# Altium PCB Transceiver.PcbDoc (part 2 of 2)
Units mm, origin at the board's own origin, x right, y up, seen from the top; angles counter-clockwise.
Board outline 140 x 70 mm, 2 copper layers (Top Layer, Bottom Layer); 90 components, 122 nets, 482 pads, 145 vias.
Unrouted connection lines stored in the file: 2.
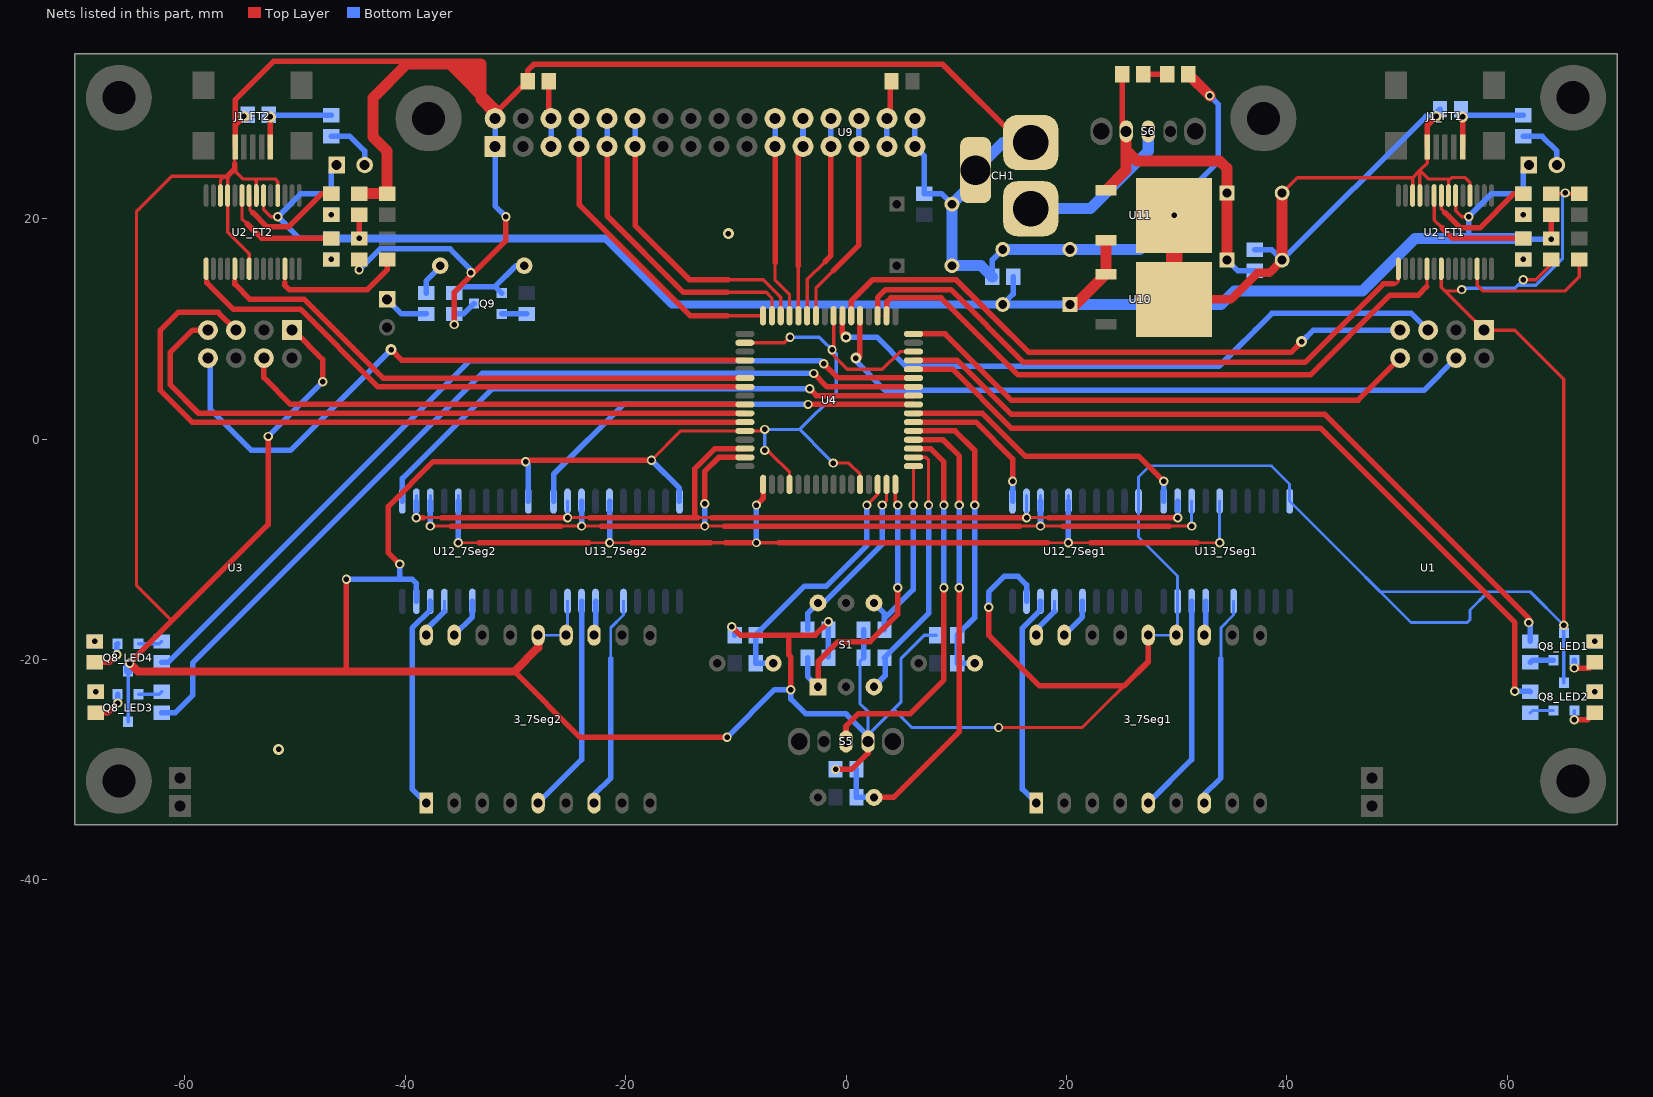
[diagram p2: the nets of this part, all layers, seen from the top]

## Via types
v1: diameter 0.85, hole 0.5, Top Layer to Bottom Layer, 111 vias
v2: diameter 1, hole 0.5, Top Layer to Bottom Layer, 24 vias
v3: diameter 0.8, hole 0.5, Top Layer to Bottom Layer, 10 vias

## Nets (pads, with @x,y where several pads share a name; then routed paths per layer and width w, separated by ;. In a path a pad name is that pad's centre, name@x,y a point inside that pad or via, vN(x,y) a via of type N, cw(c..) or ccw(c..) an arc to the next point about the centre after c; other vN are vias at no path point) (continued)
E: U4.46 U12_7Seg1.2 U12_7Seg2.2 U13_7Seg1.2 U13_7Seg2.2 | length 111.4
  Top Layer w0.254: -38.354,-7.112 -36.703,-7.112 ; v1(-25.273,-7.112) -23.241,-7.112 ; v1(16.383,-7.112) 18.415,-7.112
  Top Layer w0.3: -13.462,-7.112 -13.449,-7.099 -12.205,-7.099 -12.192,-7.112
  Top Layer w0.5: v1(-38.989,-7.112) -38.354,-7.112 ; -36.703,-7.112 v1(-25.273,-7.112) ; -23.241,-7.112 -13.716,-7.112 ; -13.462,-7.112 -13.716,-7.112 ; -12.192,-7.112 13.462,-7.112 ; -10.401,-7.112 -7.747,-7.112 13.462,-7.112 ; U4.46@-9.174,-0.844 -11.893,-0.844 -13.716,-2.667 -13.716,-7.112 ; v1@16.27,-6.999 v1(16.383,-7.112) 13.462,-7.112 ; 18.415,-7.112 v1(30.099,-7.112)
  Bottom Layer w0.254: U12_7Seg2.2@-38.989,-5.61 U12_7Seg2.2@-38.989,-5.102 ; v1(-25.273,-7.112) U13_7Seg2.2@-25.273,-5.61 ; v1(16.383,-7.112) U12_7Seg1.2@16.383,-5.61 U12_7Seg1.2@16.383,-5.102 ; v1(30.099,-7.112) U13_7Seg1.2@30.099,-5.61
  Bottom Layer w0.5: v1(-38.989,-7.112) U12_7Seg2.2@-38.989,-5.61 ; v1(30.099,-7.112) U13_7Seg1.2@30.099,-5.61
E1_7Seg1: 3_7Seg1.1 U12_7Seg1.18 | length 19.5
  Bottom Layer w0.5: 3_7Seg1.1@17.272,-33.02 16.002,-31.75 16.002,-17.145 17.653,-15.494 U12_7Seg1.18@17.653,-14.71
E1_7Seg2: 3_7Seg2.1 U12_7Seg2.18 | length 19.5
  Bottom Layer w0.5: 3_7Seg2.1@-38.1,-33.02 -39.37,-31.75 -39.37,-17.145 -37.719,-15.494 U12_7Seg2.18@-37.719,-14.71
E2_7Seg1: 3_7Seg1.5 U13_7Seg1.18 | length 19.9
  Bottom Layer w0.5: 3_7Seg1.5@27.432,-33.02 31.369,-29.083 U13_7Seg1.18@31.369,-14.71
E2_7Seg2: 3_7Seg2.5 U13_7Seg2.18 | length 19.9
  Bottom Layer w0.5: 3_7Seg2.5@-27.94,-33.02 -24.003,-29.083 U13_7Seg2.18@-24.003,-14.71
EN1_7Seg1: U4.6 U12_7Seg1.1 | length 14.2
  Top Layer w0.5: U4.6@6.126,1.556 11.779,1.556 15.113,-1.778 v1(15.113,-3.81)
  Bottom Layer w0.5: U12_7Seg1.1@15.113,-5.61 v1(15.113,-3.81)
EN1_7Seg2: U4.9 U12_7Seg2.1 | length 52.1
  Top Layer w0.5: v1(-3.302,4.572) -2.686,3.956 U4.9@6.126,3.956
  Bottom Layer w0.5: U12_7Seg2.1@-40.259,-5.61 -40.259,-3.556 -32.131,4.572 v1(-3.302,4.572)
EN2_7Seg1: U4.7 U13_7Seg1.1 | length 27.1
  Top Layer w0.5: U4.7@6.126,2.356 12.376,2.356 16.256,-1.524 26.543,-1.524 v1(28.829,-3.81)
  Bottom Layer w0.5: U13_7Seg1.1@28.829,-5.61 v1(28.829,-3.81)
EN2_7Seg2: U4.8 U13_7Seg2.1 | length 37.7
  Top Layer w0.5: v1(-3.448,3.156) U4.8@6.126,3.156
  Bottom Layer w0.5: U13_7Seg2.1@-26.543,-5.61 -26.543,-3.175 -20.212,3.156 v1(-3.448,3.156)
F: U4.47 U12_7Seg1.3 U12_7Seg2.3 U13_7Seg1.3 U13_7Seg2.3 | length 92.4
  Top Layer w0.254: v1(-37.719,-7.874) -35.814,-7.874 ; -25.908,-7.874 v1(-24.003,-7.874) -22.225,-7.874 ; 15.748,-7.874 v1(17.653,-7.874) 19.685,-7.874 ; 29.337,-7.874 v1(31.369,-7.874)
  Top Layer w0.3: v3(-12.827,-7.874) -11.049,-7.874
  Top Layer w0.5: -35.814,-7.874 -25.908,-7.874 ; -22.225,-7.874 -13.716,-7.874 v3@-13.208,-7.874 ; v1(-12.827,-5.842) -12.827,-2.921 -11.55,-1.644 U4.47@-9.174,-1.644 ; -11.049,-7.874 15.748,-7.874 ; 19.685,-7.874 29.337,-7.874
  Bottom Layer w0.254: U12_7Seg2.3@-37.719,-5.61 U12_7Seg2.3@-37.719,-5.102 ; v1(-24.003,-7.874) U13_7Seg2.3@-24.003,-5.61 ; v1(17.653,-7.874) U12_7Seg1.3@17.653,-5.61 U12_7Seg1.3@17.653,-5.102 ; v1(31.369,-7.874) U13_7Seg1.3@31.369,-5.61
  Bottom Layer w0.5: v1(-37.719,-7.874) U12_7Seg2.3@-37.719,-5.61 ; v1(-24.003,-7.874) U13_7Seg2.3@-24.003,-5.61 ; v3(-12.827,-7.874) v1(-12.827,-5.842) ; v1(17.653,-7.874) U12_7Seg1.3@17.653,-5.61
F1_7Seg1: 3_7Seg1.18 U12_7Seg1.17 | length 11.3
  Bottom Layer w0.254: 3_7Seg1.18@17.272,-17.78 3_7Seg1.18@17.272,-17.272 ; U12_7Seg1.17@18.923,-14.71 U12_7Seg1.17@18.923,-15.621 ; 3_7Seg1.18@17.272,-17.272 U12_7Seg1.17@18.923,-15.621 ; 3_7Seg1.18@17.272,-17.272 U12_7Seg1.17@18.923,-15.621
  Bottom Layer w0.5: 3_7Seg1.18@17.272,-17.78 17.462,-17.59 17.462,-17.081 18.923,-15.621 3_7Seg1.18@17.272,-17.272
F1_7Seg2: 3_7Seg2.18 U12_7Seg2.17 | length 11.3
  Bottom Layer w0.254: 3_7Seg2.18@-38.1,-17.78 3_7Seg2.18@-38.1,-17.272 ; U12_7Seg2.17@-36.449,-14.71 U12_7Seg2.17@-36.449,-15.621 ; 3_7Seg2.18@-38.1,-17.272 U12_7Seg2.17@-36.449,-15.621 ; 3_7Seg2.18@-38.1,-17.272 U12_7Seg2.17@-36.449,-15.621
  Bottom Layer w0.5: 3_7Seg2.18@-38.1,-17.78 -37.91,-17.59 -37.91,-17.081 -36.449,-15.621 3_7Seg2.18@-38.1,-17.272
F2_7Seg1: 3_7Seg1.12 U13_7Seg1.17 | length 3.3
  Bottom Layer w0.254: U13_7Seg1.17@32.512,-14.837 U13_7Seg1.17@32.639,-14.71
  Bottom Layer w0.5: 3_7Seg1.12@32.512,-17.78 32.639,-17.653 U13_7Seg1.17@32.639,-14.71
F2_7Seg2: 3_7Seg2.12 U13_7Seg2.17 | length 3.3
  Bottom Layer w0.254: U13_7Seg2.17@-22.86,-14.837 U13_7Seg2.17@-22.733,-14.71
  Bottom Layer w0.5: 3_7Seg2.12@-22.86,-17.78 -22.733,-17.653 U13_7Seg2.17@-22.733,-14.71
G: U4.49 U12_7Seg1.5 U12_7Seg2.5 U13_7Seg1.5 U13_7Seg2.5 | length 135.2
  Top Layer w0.2: -6.096,-9.398 -5.461,-9.398
  Top Layer w0.254: v1(-35.179,-9.398) v1(-21.463,-9.398) -19.431,-9.398 ; 2.921,-9.398 v1(20.193,-9.398) v1(33.909,-9.398)
  Top Layer w0.3: -12.319,-9.398 -10.922,-9.398 ; v3(-8.128,-9.398) -6.096,-9.398
  Top Layer w0.5: -33.274,-9.398 -23.368,-9.398 ; -19.431,-9.398 -13.589,-9.398 ; -13.208,-9.398 -13.589,-9.398 ; -12.319,-9.398 -13.589,-9.398 ; -10.922,-9.398 v3(-8.128,-9.398) ; v1(-8.128,-5.969) -7.524,-5.365 U4.49@-7.524,-4.094 ; -6.096,-9.398 -4.064,-9.398 ; -4.953,-9.398 -4.064,-9.398 ; 18.288,-9.398 2.921,-9.398 -4.064,-9.398 ; 22.225,-9.398 31.877,-9.398
  Bottom Layer w0.254: U12_7Seg2.5@-35.179,-5.61 U12_7Seg2.5@-35.179,-5.102 ; v1(-21.463,-9.398) U13_7Seg2.5@-21.463,-5.61 ; v1(20.193,-9.398) U12_7Seg1.5@20.193,-5.61 U12_7Seg1.5@20.193,-5.102 ; v1(33.909,-9.398) U13_7Seg1.5@33.909,-5.61
  Bottom Layer w0.5: v1(-35.179,-9.398) U12_7Seg2.5@-35.179,-5.61 ; v1(-21.463,-9.398) U13_7Seg2.5@-21.463,-5.61 ; v3(-8.128,-9.398) v1(-8.128,-5.969) ; v1(20.193,-9.398) U12_7Seg1.5@20.193,-5.61
G1_7Seg1: 3_7Seg1.17 U12_7Seg1.15 | length 3.8
  Bottom Layer w0.5: 3_7Seg1.17@19.812,-17.78 21.463,-16.129 U12_7Seg1.15@21.463,-14.71
G1_7Seg2: 3_7Seg2.17 U12_7Seg2.15 | length 3.8
  Bottom Layer w0.5: 3_7Seg2.17@-35.56,-17.78 -33.909,-16.129 U12_7Seg2.15@-33.909,-14.71
G2_7Seg1: 3_7Seg1.7 U13_7Seg1.15 | length 19.4
  Bottom Layer w0.254: 34.025,-19.939 34.025,-17.105 35.179,-15.951 U13_7Seg1.15@35.179,-14.71
  Bottom Layer w0.5: 3_7Seg1.7@32.512,-33.02 32.512,-32.258 34.025,-30.745 34.025,-19.939
G2_7Seg2: 3_7Seg2.7 U13_7Seg2.15 | length 19.4
  Bottom Layer w0.254: -21.347,-19.939 -21.347,-17.105 -20.193,-15.951 U13_7Seg2.15@-20.193,-14.71
  Bottom Layer w0.5: 3_7Seg2.7@-22.86,-33.02 -22.86,-32.258 -21.347,-30.745 -21.347,-19.939
GND: 3_7Seg1.13 3_7Seg1.14 3_7Seg2.13 3_7Seg2.14 C1_FT1.1 C1_FT2.1 C2_FT1.1 C2_FT2.1 C3_FT1.2 C3_FT2.2 C4_FT1.1 C4_FT2.1 C7.2 C9.2 C10.1 C11.2 C12.1 C13.2 C14.1 C15.2 C16.2 C22.2 CH1.1 CH1.2 D4.2 J1_FT1.5 J1_FT2.5 Q8_LED1.3 Q8_LED2.3 Q8_LED3.3 Q8_LED4.3 Q9.3 R4.2 R8.1 R9.1 R10.1 R11.1 R12.1 R16.1 R17.1 S5.3 U1.1 U2_FT1.7 U2_FT1.18 U2_FT1.21 U2_FT1.25 U2_FT1.26 U2_FT2.7 U2_FT2.18 U2_FT2.21 U2_FT2.25 U2_FT2.26 U3.1 U4.14 U4.24 U4.34 U4.44 U4.52 U4.60 U9.1 U9.16 U10.4 U11.4 U12_7Seg1.10 U12_7Seg1.19 U12_7Seg2.10 U12_7Seg2.19 U13_7Seg1.10 U13_7Seg1.19 U13_7Seg2.10 U13_7Seg2.19 | length 866.4
  Top Layer w0.3: -61.187,-16.483 -64.389,-13.281 -64.389,20.701 -61.214,23.876 -56.134,23.876 ; U2_FT2.26@-56.773,22.121 -56.773,23.491 -56.388,23.876 -56.123,23.611 U2_FT2.25@-56.123,22.121 -56.123,18.785 -54.173,16.835 U2_FT2.7@-54.173,15.471 ; -55.499,24.384 -54.737,23.622 -53.721,23.622 -53.523,23.424 U2_FT2.21@-53.523,22.121 ; -55.499,25.019 -55.499,26.479 J1_FT2.5@-55.448,26.53 ; -53.975,23.622 -51.816,23.622 -51.573,23.379 U2_FT2.18@-51.573,22.121 -51.573,23.252 ; v1(-17.653,-1.905) -14.992,0.756 U4.44@-9.174,0.756 -7.499,0.756 v1(-7.366,0.889) ; U4.34@-9.174,8.756 -5.595,8.756 v1(-5.08,9.271) ; v1(-7.366,-1.016) -7.112,-1.016 -6.985,-1.143 -6.858,-1.27 -5.124,-3.004 U4.52@-5.124,-4.094 ; v1(-1.143,-2.159) 0.254,-2.159 1.276,-3.181 U4.60@1.276,-4.094 ; U4.24@-1.124,11.206 -1.124,8.274 v1(-1.27,8.128) -1.27,7.747 0.127,6.35 3.302,6.35 4.908,7.956 U4.14@6.126,7.956 ; v1(13.843,-26.162) 21.463,-26.162 27.154,-20.471 ; C7.2@39.584,22.352 40.977,23.745 51.431,23.745 ; U2_FT1.26@51.431,22.121 51.431,23.745 ; U2_FT1.25@52.081,22.121 52.081,24.395 ; J1_FT1.5@52.756,26.53 52.756,25.07 52.081,24.395 ; U2_FT1.7@54.031,15.471 54.031,13.787 U1.1@57.912,9.906 60.706,9.906 65.151,5.461 v1(65.151,-16.891) ; 54.365,13.453 55.744,13.453 v1(55.88,13.589) ; U2_FT1.21@54.681,22.121 54.681,23.439 54.991,23.749 ; U2_FT1.18@56.631,22.121 56.631,23.308 56.19,23.749 54.991,23.749 ; v1(61.468,14.478) 62.611,14.478 64.008,15.875 C3_FT1.2@64.008,16.322 ; C2_FT1.1@64.008,22.286 v1@65.212,22.286 ; C1_FT1.1@66.548,22.286 v1@65.212,22.286 ; 51.431,23.745 52.081,24.395 ; 52.081,24.395 52.854,23.622 54.864,23.622 54.991,23.749 ; v1@65.212,22.286 v1(65.278,22.352) v1@65.212,22.286
  Top Layer w0.5: v1(-65.024,-20.32) -52.451,-7.747 v1(-52.451,0.254) ; -56.134,23.876 -55.499,24.511 -55.499,24.638 ; -55.499,24.384 -55.499,24.638 ; -55.499,25.019 -55.499,24.638 ; J1_FT2.5@-55.448,26.53 -55.448,28.499 ; v2(-54.648,29.299) -55.245,28.702 -55.448,28.499 ; U3.1@-50.292,9.906 -50.165,9.906 -47.498,7.239 v1(-47.498,5.207) ; -45.466,-21.082 -45.339,-20.955 v1(-45.339,-12.7) ; v1(-44.196,15.367) C3_FT2.2@-44.196,16.322 ; v1(-40.513,-11.326) -41.529,-10.31 -41.529,-6.096 -37.465,-2.032 v1(-29.083,-2.032) -28.956,-1.905 v1(-17.653,-1.905) ; -39.878,34.036 -40.132,34.29 -51.943,34.29 -55.448,30.785 -55.448,28.499 ; v1(-35.56,10.414) -35.56,13.335 -34.544,14.351 ; v1(-34.036,15.113) -33.909,14.986 -34.544,14.351 ; U9.1@-31.843,29.107 -31.843,29.559 R4.2@-28.89,32.512 -28.89,33.467 -28.321,34.036 8.763,34.036 15.875,26.924 CH1.2@16.764,26.924 ; v1(-30.861,20.193) -30.861,18.034 -34.544,14.351 ; -30.099,-21.082 -24.13,-27.051 v1(-10.795,-27.051) ; v1(-10.369,-17.03) -9.619,-17.78 -5.207,-17.78 ; v1(-5,-22.733) -5,-19.765 -5.207,-19.558 -5.207,-17.78 ; v1(-1.59,-16.571) -2.799,-17.78 -5.207,-17.78 ; v1(-0.95,-29.972) 0.508,-29.972 2,-28.48 S5.3@2,-27.432 ; v1(12.954,-15.24) 12.954,-17.78 17.526,-22.352 25.273,-22.352 27.432,-20.193 3_7Seg1.14@27.432,-17.78 ; J1_FT1.5@52.756,26.53 52.756,28.499 v2(53.556,29.299)
  Top Layer w0.75: v1(-65.024,-20.32) -64.262,-21.082 -30.099,-21.082 -27.94,-18.923 3_7Seg2.14@-27.94,-17.78 ; U10.4@29.79,12.7 34.925,12.7 37.331,15.106 38.434,15.106 C9.2@39.584,16.256
  Top Layer w1: C2_FT2.1@-44.196,22.286 C14.1@-41.656,22.286 -41.656,26.162 -42.926,27.432 -42.926,30.988 -39.878,34.036 -33.147,34.036 -33.147,30.863 -31.843,29.559 -31.843,29.938 -35.941,34.036 -34.671,34.036 -33.147,32.512 ; D4.2@31.049,33.147 v1(33.02,31.176) ; C9.2@39.584,16.256 C7.2@39.584,22.352
  Top Layer w1.5: U10.4@29.79,12.7 v1(29.79,20.32)
  Bottom Layer w0.254: 3_7Seg2.14@-27.94,-17.78 3_7Seg2.13@-25.4,-17.78 -25.273,-17.653 U13_7Seg2.19@-25.273,-14.71 ; R8.1@-1.651,-19.807 -1.59,-19.746 R8.1@-1.59,-19.812 ; 3_7Seg1.14@27.432,-17.78 3_7Seg1.13@29.972,-17.78 30.099,-17.653 U13_7Seg1.19@30.099,-14.71 30.099,-12.427 26.543,-8.871 U12_7Seg1.10@26.543,-5.61 26.543,-3.429 27.559,-2.413 38.608,-2.413 40.259,-4.064 U13_7Seg1.10@40.259,-5.61 51.286,-16.637 56.388,-16.637 56.642,-16.383 56.642,-15.494 58.293,-13.843 58.801,-13.843 ; 45.729,-11.08 48.492,-13.843 58.801,-13.843 ; v1(65.151,-16.891) 62.103,-13.843 58.801,-13.843
  Bottom Layer w0.3: Q8_LED3.3@-65.151,-25.634 Q8_LED4.3@-65.151,-21.062 ; v1(-7.366,-1.016) v1(-7.366,0.889) -4.191,0.889 ; v1(-5.08,9.271) -2.413,9.271 -0.889,7.747 -0.889,4.191 -4.191,0.889 ; v1(-1.143,-2.159) -1.778,-1.524 -4.191,0.889 ; R10.1@1.59,-19.812 1.27,-20.132 1.27,-24.003 2,-24.733 S5.3@2,-27.432 2,-26.829 4.318,-24.511 ; R17.1@8.194,-17.78 7.112,-17.78 5,-19.892 5,-23.829 4.318,-24.511 ; v1(13.843,-26.162) 5.969,-26.162 4.318,-24.511 ; v1(55.88,13.589) 56.007,13.716 60.706,13.716 60.96,13.97 ; v1(61.468,14.478) 60.96,13.97 ; Q8_LED2.3@65.151,-22.118 Q8_LED1.3@65.151,-17.546 v1(65.151,-16.891) ; v1(65.278,22.352) 65.024,22.098 65.024,16.383 62.611,13.97 60.96,13.97
  Bottom Layer w0.5: v2(-54.648,29.299) C4_FT2.1@-54.483,29.464 ; v1(-52.451,0.254) v1(-47.498,5.207) ; v1(-45.339,-12.7) -40.513,-12.7 ; v1(-44.196,15.367) -42.291,17.272 -35.941,17.272 -34.036,15.367 v1(-34.036,15.113) ; v1(-40.513,-11.326) -40.513,-12.7 ; U12_7Seg2.19@-38.989,-14.71 -38.989,-13.081 -39.37,-12.7 -40.513,-12.7 ; v1(-35.56,10.414) C22.2@-35.56,11.369 -34.712,11.369 Q9.3@-33.762,12.319 ; U9.1@-31.843,29.107 U9.1@-31.843,26.567 -31.843,21.175 v1(-30.861,20.193) ; v1(-29.083,-2.032) -28.829,-2.286 U12_7Seg2.10@-28.829,-5.61 ; v1(-17.653,-1.905) -15.113,-4.445 U13_7Seg2.10@-15.113,-5.61 ; v1(-10.795,-27.051) -6.477,-22.733 v1(-5,-22.733) -5,-23.575 -3.643,-24.932 0,-24.932 2,-26.932 S5.3@2,-27.432 ; v1(-10.369,-17.03) -10.094,-17.305 R16.1@-10.094,-17.78 ; R8.1@-1.59,-19.746 R11.1@-1.59,-17.272 v1(-1.59,-16.571) ; R10.1@1.59,-19.812 R9.1@1.59,-17.272 ; U9.16@6.257,29.107 U9.16@6.257,26.567 7.112,25.712 C1_FT2.1@7.112,22.286 8.662,22.286 C16.2@9.612,21.336 ; v1(12.954,-15.24) 12.954,-13.843 14.351,-12.446 15.621,-12.446 16.383,-13.208 U12_7Seg1.19@16.383,-14.71 ; C12.1@13.274,14.732 13.274,16.282 C15.2@14.224,17.232 ; v1(29.79,20.32) 29.79,21.157 33.782,25.149 33.782,30.414 v1(33.02,31.176) ; C10.1@37.084,17.206 38.634,17.206 C9.2@39.584,16.256 52.627,29.299 53.241,29.299 C4_FT1.1@53.914,29.972 ; v2(53.556,29.299) C4_FT1.1@53.721,29.464
  Bottom Layer w0.75: Q8_LED4.3@-65.151,-21.062 -65.151,-20.447 v1(-65.024,-20.32)
  Bottom Layer w1: C12.1@13.274,14.732 12.258,15.748 C13.2@9.612,15.748 C16.2@9.612,21.336 11.764,23.488 CH1.1@11.764,24.424 14.264,26.924 CH1.2@16.764,26.924 ; C15.2@14.224,17.232 18.415,17.232 ; C11.2@20.32,17.232 18.415,17.232 ; v1(29.79,20.32) 26.702,17.232 18.415,17.232
  other v2: -51.495,-28.144 -10.667,18.668
ID0: R8.2 S1.1 U4.64 | length 26.4
  Top Layer w0.3: U4.64@4.476,-4.094 4.476,-5.746 v1(4.699,-5.969)
  Top Layer w0.5: S1.1@-2.54,-22.479 -2.54,-20.193 -0.723,-18.376 2.198,-18.376 4.699,-15.875 v1(4.699,-13.462)
  Bottom Layer w0.3: v1@4.699,-13.589 v1@4.826,-13.462
  Bottom Layer w0.5: R8.2@-3.49,-19.812 -3.49,-21.529 S1.1@-2.54,-22.479 ; v1(4.699,-13.462) v1(4.699,-5.969)
ID1: R9.2 S1.4 U4.1 | length 17.7
  Top Layer w0.3: v1(6.096,-5.969) 6.126,-5.939 U4.1@6.126,-2.444
  Bottom Layer w0.5: S1.4@2.54,-14.859 3.49,-15.809 3.49,-16.256 ; R9.2@3.49,-17.272 3.49,-16.256 ; v1(6.096,-5.969) 6.096,-13.65 3.49,-16.256
ID2: R10.2 S1.3 U4.2 | length 24.1
  Top Layer w0.3: U4.2@6.126,-1.644 7.232,-1.644 7.493,-1.905 v1(7.493,-5.969)
  Bottom Layer w0.5: S1.3@2.54,-22.479 3.556,-21.463 R10.2@3.556,-19.812 ; R10.2@3.49,-19.812 7.493,-15.809 v1(7.493,-5.969)
ID3: R11.2 S1.6 U4.63 | length 16.8
  Top Layer w0.3: v1(3.302,-5.969) 3.676,-5.595 U4.63@3.676,-4.094
  Bottom Layer w0.3: S1.6@-2.54,-14.859 S1.6@-2.54,-14.497
  Bottom Layer w0.5: R11.2@-3.49,-17.272 -3.49,-15.809 S1.6@-2.54,-14.859 -2.032,-14.859 3.302,-9.525 v1(3.302,-5.969)
IRQ1: U1.8 U4.16 | length 48.2
  Top Layer w0.5: U4.16@6.126,9.556 8.986,9.556 14.986,3.556 46.482,3.556 U1.8@50.292,7.366
IRQ2: U3.8 U4.36 | length 60.8
  Top Layer w0.5: v2(-41.275,8.128) -40.303,7.156 U4.36@-9.174,7.156
  Bottom Layer w0.5: U3.8@-57.912,7.366 -57.721,7.175 -57.721,2.73 -53.975,-1.016 -50.419,-1.016 -44.45,4.953 ; -45.72,3.683 -44.45,4.953 ; v2(-41.275,8.128) -44.45,4.953
K0: C5.1 R16.2 S3.1 U4.62 | length 23.6
  Top Layer w0.3: v1(1.905,-5.969) 2.876,-4.998 U4.62@2.876,-4.094
  Bottom Layer w0.5: S3.1@-6.604,-20.32 C5.1@-8.194,-20.32 R16.2@-8.194,-17.78 -3.749,-13.335 -1.778,-13.335 1.905,-9.652 v1(1.905,-5.969)
K1: C8.1 R12.2 S2.1 U4.4 | length 44.1
  Top Layer w0.5: S2.1@2.54,-32.512 4.318,-32.512 10.287,-26.543 v1(10.287,-13.462) ; U4.4@6.126,-0.044 8.807,-0.044 10.287,-1.524 v1(10.287,-5.969)
  Bottom Layer w0.5: R12.2@0.95,-29.972 C8.1@0.95,-32.512 S2.1@2.54,-32.512 ; v1(10.287,-13.462) v1(10.287,-5.969)
K2: C6.1 R17.2 S4.1 U4.5 | length 27.8
  Top Layer w0.5: U4.5@6.126,0.756 9.912,0.756 11.684,-1.016 v1(11.684,-5.969)
  Bottom Layer w0.5: S4.1@11.684,-20.32 C6.1@10.094,-20.32 R17.2@10.094,-17.78 11.684,-16.19 v1(11.684,-5.969)
K3: S5.2 U4.3 | length 35.1
  Top Layer w0.5: S5.2@0,-27.432 0,-26.035 1.143,-24.892 5.842,-24.892 8.89,-21.844 v1(8.89,-13.462) ; U4.3@6.126,-0.844 7.676,-0.844 8.89,-2.058 v1(8.89,-5.969)
  Bottom Layer w0.5: v1(8.89,-13.462) v1(8.89,-5.969)
LCDDB4: U4.29 U9.11 | length 18.4
  Top Layer w0.3: -6.443,16.002 -6.443,14.444 -5.124,13.125 U4.29@-5.124,11.206
  Top Layer w0.5: -6.443,16.002 U9.11@-6.443,26.567
  Bottom Layer w0.5: U9.11@-6.443,26.567 U9.11@-6.443,29.107
LCDDB5: U4.28 U9.12 | length 18.1
  Top Layer w0.3: U4.28@-4.324,11.206 -4.324,15.748
  Top Layer w0.5: -4.324,15.748 -4.324,26.146 U9.12@-3.903,26.567
  Bottom Layer w0.5: U9.12@-3.903,26.567 U9.12@-3.903,29.107
LCDDB6: U4.27 U9.13 | length 18.8
  Top Layer w0.3: U4.27@-3.524,11.206 -3.524,14.51 -1.905,16.129
  Top Layer w0.5: -1.905,16.129 -1.363,16.671 U9.13@-1.363,26.567
  Bottom Layer w0.5: U9.13@-1.363,26.567 U9.13@-1.363,29.107
LCDDB7: U4.26 U9.14 | length 19.5
  Top Layer w0.3: U4.26@-2.724,11.206 -2.724,13.716 -1.143,15.297
  Top Layer w0.5: -1.143,15.297 1.177,17.617 U9.14@1.177,26.567
  Bottom Layer w0.5: U9.14@1.177,26.567 U9.14@1.177,29.107
LCDEN: U4.30 U9.6 | length 27.3
  Top Layer w0.3: -10.668,14.478 -7.493,14.478 -5.924,12.909 U4.30@-5.924,11.206
  Top Layer w0.5: U9.6@-19.143,26.567 -19.143,19.397 -14.224,14.478 -10.668,14.478
  Bottom Layer w0.5: U9.6@-19.143,26.567 U9.6@-19.143,29.107
LCDRS: U4.32 U9.4 | length 28.7
  Top Layer w0.3: -10.795,11.206 U4.32@-7.524,11.206
  Top Layer w0.5: U9.4@-24.223,26.567 -24.223,21.302 -14.127,11.206 -10.795,11.206
  Bottom Layer w0.5: U9.4@-24.223,26.567 U9.4@-24.223,29.107
LCDRW: U4.31 U9.5 | length 28.5
  Top Layer w0.3: -10.795,13.335 -7.239,13.335 -6.724,12.82 U4.31@-6.724,11.206
  Top Layer w0.5: U9.5@-21.683,26.567 -21.683,20.286 -14.732,13.335 -10.795,13.335
  Bottom Layer w0.5: U9.5@-21.683,26.567 U9.5@-21.683,29.107
LED1: R13_LED1.1 U4.13 | length 67.7
  Top Layer w0.5: U4.13@6.126,7.156 10.116,7.156 14.986,2.286 43.434,2.286 61.976,-16.256 v1(61.976,-16.637)
  Bottom Layer w0.5: v1(61.976,-16.637) 62.103,-16.764 R13_LED1.1@62.103,-18.354
LED2: R13_LED2.1 U4.12 | length 74
  Top Layer w0.5: U4.12@6.126,6.356 9.646,6.356 14.986,1.016 43.053,1.016 60.706,-16.637 60.706,-19.304 ; v1(60.706,-22.86) 60.706,-19.304 ; 60.706,-17.018 60.706,-19.304
  Bottom Layer w0.5: v1(60.706,-22.86) 62.037,-22.86 R13_LED2.1@62.103,-22.926
LED3: R13_LED3.1 U4.10 | length 83.2
  Top Layer w0.5: v1(-2.921,5.969) -1.708,4.756 U4.10@6.126,4.756
  Bottom Layer w0.5: R13_LED3.1@-62.103,-24.826 -60.894,-24.826 -59.309,-23.241 -59.309,-20.32 -33.02,5.969 v1(-2.921,5.969)
LED4: R13_LED4.1 U4.11 | length 80.2
  Top Layer w0.5: v1(-2.032,6.858) -0.762,5.588 6.094,5.588 U4.11@6.126,5.556
  Bottom Layer w0.5: R13_LED4.1@-62.103,-20.254 -61.529,-20.254 -34.163,7.112 -2.286,7.112 v1(-2.032,6.858)
MISO1: U1.7 U4.22 | length 55.5
  Top Layer w0.5: U4.22@0.476,11.206 0.476,12.541 2.413,14.478 9.992,14.478 13.363,11.107 16.596,7.874 40.386,7.874 v2(41.362,8.85)
  Bottom Layer w0.5: v2(41.362,8.85) 42.418,9.906 U1.7@50.292,9.906
MISO2: U3.7 U4.42 | length 60.4
  Top Layer w0.5: U3.7@-57.912,9.906 -59.309,9.906 -61.341,7.874 -61.341,4.953 -58.744,2.356 U4.42@-9.174,2.356
MOSI1: U1.4 U4.21 | length 61.2
  Top Layer w0.5: v2(0.889,7.366) 1.143,7.366 1.27,7.493 1.27,11.2 U4.21@1.276,11.206
  Bottom Layer w0.5: v2(0.889,7.366) 0.889,7.112 3.556,4.445 52.451,4.445 U1.4@55.372,7.366
MOSI2: U3.4 U4.41 | length 46.4
  Top Layer w0.5: U3.4@-52.832,7.366 -52.832,5.588 -50.4,3.156 U4.41@-9.174,3.156
NetC4_FT1_2: C4_FT1.2 FB1_FT1.2 J1_FT1.1 | length 8.5
  Top Layer w0.5: J1_FT1.1@55.956,26.53 v2(55.956,29.261)
  Bottom Layer w0.5: C4_FT1.2@55.814,29.464 55.88,29.398 FB1_FT1.2@61.468,29.398 ; v2(55.956,29.261) C4_FT1.2@55.956,29.322
NetC4_FT2_2: C4_FT2.2 FB1_FT2.2 J1_FT2.1 | length 8.5
  Top Layer w0.5: J1_FT2.1@-52.248,26.53 v2(-52.248,29.261)
  Bottom Layer w0.5: C4_FT2.2@-52.39,29.464 -52.324,29.398 FB1_FT2.2@-46.736,29.398 ; v2(-52.248,29.261) C4_FT2.2@-52.248,29.322
NetC22_1: C22.1 LS1.1 Q9.1 | length 8.2
  Bottom Layer w0.5: C22.1@-35.56,13.269 -34.986,13.843 -31.836,13.843 ; Q9.1@-31.262,13.269 -31.836,13.843 ; LS1.1@-29.21,15.748 -29.931,15.748 -31.836,13.843
NetCH1_3: CH1.3 S6.2 | length 14.6
  Bottom Layer w1: CH1.3@16.764,20.924 22.194,20.924 27.432,26.162 S6.2@27.432,27.94
NetD1_FT1_1: D1_FT1.1 R1_FT1.1
  other v2: 61.468,16.322
NetD1_FT1_2: D1_FT1.2 U2_FT1.23 | length 11
  Top Layer w0.3: U2_FT1.23@53.381,22.121 53.381,19.898 54.102,19.177
  Top Layer w0.5: 54.102,19.177 55.057,18.222 D1_FT1.2@61.468,18.222
NetD1_FT2_1: D1_FT2.1 R1_FT2.1
  other v2: -46.736,16.322
NetD1_FT2_2: D1_FT2.2 U2_FT2.23 | length 10.9
  Top Layer w0.3: U2_FT2.23@-54.823,22.121 -54.823,20.025 -54.356,19.558
  Top Layer w0.5: -54.356,19.558 -53.02,18.222 D1_FT2.2@-46.736,18.222
NetD2_FT1_1: D2_FT1.1 R2_FT1.1
  other v2: 61.468,20.386
NetD2_FT1_2: D2_FT1.2 U2_FT1.22 | length 11.2
  Top Layer w0.3: U2_FT1.22@53.975,22.121 53.975,22.573 U2_FT1.22@54.031,22.629 ; U2_FT1.22@54.031,22.121 54.031,20.899 54.353,20.577
  Top Layer w0.5: 54.353,20.577 55.753,19.177 57.531,19.177 60.64,22.286 D2_FT1.2@61.468,22.286
NetD2_FT2_1: D2_FT2.1 R2_FT2.1 | length 0
  other v2: -46.736,20.386
NetD2_FT2_2: D2_FT2.2 U2_FT2.22 | length 10.7
  Top Layer w0.3: U2_FT2.22@-54.229,22.573 U2_FT2.22@-54.173,22.629 ; U2_FT2.22@-54.173,22.121 -54.173,22.065 -54.154,22.046 -54.098,22.046 -54.098,20.824 -53.834,20.56
  Top Layer w0.5: -53.834,20.56 -52.578,19.304 -50.546,19.304 -47.564,22.286 D2_FT2.2@-46.736,22.286
NetD3_LED1_1: D3_LED1.1 R14_LED1.1
  other v2: 67.945,-18.354
NetD3_LED1_2: D3_LED1.2 Q8_LED1.1 | length 2.8
  Top Layer w0.5: v1(66.101,-20.762) 67.437,-20.762 D3_LED1.2@67.945,-20.254
  Bottom Layer w0.5: v1(66.101,-20.762) Q8_LED1.1@66.101,-20.046
NetD3_LED2_1: D3_LED2.1 R14_LED2.1
  other v2: 67.945,-22.926
NetD3_LED2_2: D3_LED2.2 Q8_LED2.1 | length 3
  Top Layer w0.5: v1(66.101,-25.461) 67.31,-25.461 D3_LED2.2@67.945,-24.826
  Bottom Layer w0.3: v1(66.101,-25.461) Q8_LED2.1@66.101,-24.618
NetD3_LED3_1: D3_LED3.1 R14_LED3.1
  other v2: -68.072,-22.926
NetD3_LED3_2: D3_LED3.2 Q8_LED3.1 | length 3.1
  Top Layer w0.5: D3_LED3.2@-68.072,-24.826 -66.985,-24.826 v1(-66.101,-23.942)
  Bottom Layer w0.5: v1(-66.101,-23.942) Q8_LED3.1@-66.101,-23.134
NetD3_LED4_1: D3_LED4.1 R14_LED4.1
  other v2: -68.199,-18.354
NetD3_LED4_2: D3_LED4.2 Q8_LED4.1 | length 3.3
  Top Layer w0.5: D3_LED4.2@-68.199,-20.254 -66.863,-20.254 v1(-66.167,-19.558)
  Bottom Layer w0.5: v1(-66.167,-19.558) -66.167,-18.628 Q8_LED4.1@-66.101,-18.562
NetD4_1: D4.1 R15.2 | length 2.2
  Top Layer w0.5: R15.2@26.985,33.147 D4.1@29.149,33.147
NetFB1_FT1_1: FB1_FT1.1 JP1_FT1.2 | length 4.9
  Bottom Layer w0.5: FB1_FT1.1@61.468,27.498 63.18,27.498 64.516,26.162 JP1_FT1.2@64.516,24.892
NetFB1_FT2_1: FB1_FT2.1 JP1_FT2.2 | length 4.9
  Bottom Layer w0.5: FB1_FT2.1@-46.736,27.498 -45.024,27.498 -43.688,26.162 JP1_FT2.2@-43.688,24.892
NetJP2_1: JP2.1 R6.2 | length 4.1
  Bottom Layer w0.5: JP2.1@-41.656,12.7 -40.325,11.369 R6.2@-38.1,11.369
NetLS1_2: LS1.2 R6.1 | length 3
  Bottom Layer w0.5: R6.1@-38.1,13.269 -38.1,14.351 -36.83,15.621 LS1.2@-36.83,15.748
NetQ8_LED1_2: Q8_LED1.2 R13_LED1.2 | length 2.2
  Bottom Layer w0.5: R13_LED1.2@62.103,-20.254 62.311,-20.046 Q8_LED1.2@64.201,-20.046
NetQ8_LED2_2: Q8_LED2.2 R13_LED2.2 | length 2.2
  Bottom Layer w0.3: R13_LED2.2@62.103,-24.826 62.311,-24.618 Q8_LED2.2@64.201,-24.618
NetQ8_LED3_2: Q8_LED3.2 R13_LED3.2 | length 2.2
  Bottom Layer w0.3: Q8_LED3.2@-64.201,-23.134 -62.311,-23.134 R13_LED3.2@-62.103,-22.926
NetQ8_LED4_2: Q8_LED4.2 R13_LED4.2 | length 2.2
  Bottom Layer w0.3: Q8_LED4.2@-64.201,-18.562 -62.311,-18.562 R13_LED4.2@-62.103,-18.354
NetQ9_2: Q9.2 R5.1 | length 2.3
  Bottom Layer w0.5: Q9.2@-31.262,11.369 R5.1@-28.956,11.369
NetR3_FT1_1: R3_FT1.1 U2_FT1.12 | length 13.1
  Top Layer w0.3: U2_FT1.12@57.281,15.471 57.281,13.966 57.785,13.462 65.278,13.462 66.548,14.732 R3_FT1.1@66.548,16.322
NetR3_FT2_1: R3_FT2.1 U2_FT2.12 | length 12.6
  Top Layer w0.3: -50.927,14.224 -50.927,15.467 U2_FT2.12@-50.923,15.471
  Top Layer w0.5: -50.927,14.224 -50.927,13.97 -50.546,13.589 -43.434,13.589 -41.656,15.367 R3_FT2.1@-41.656,16.322
NetR4_1: R4.1 U9.3 | length 6
  Top Layer w0.5: R4.1@-26.99,32.512 -26.99,29.334 U9.3@-26.763,29.107
  Bottom Layer w0.5: U9.3@-26.763,26.567 U9.3@-26.763,29.107
NetR7_1: R7.1 U9.15 | length 6.1
  Top Layer w0.5: U9.15@3.717,29.107 3.998,29.388 R7.1@3.998,32.512
  Bottom Layer w0.5: U9.15@3.717,26.567 U9.15@3.717,29.107
RX1: U2_FT1.5 U4.18 | length 58.3
  Top Layer w0.3: 52.705,13.843 52.731,13.869 U2_FT1.5@52.731,15.471
  Top Layer w0.5: U4.18@3.676,11.206 3.683,11.213 3.683,12.446 4.064,12.827 8.636,12.827 15.621,5.842 42.138,5.842 49.377,13.081 51.943,13.081 52.705,13.843
RX2: U2_FT2.5 U4.38 | length 51.8
  Top Layer w0.3: U2_FT2.5@-55.499,15.953 -55.473,15.979 U2_FT2.5@-55.473,15.471 -55.473,14.351
  Top Layer w0.5: -55.473,14.351 -55.473,14.071 -54.102,12.7 -49.149,12.7 -42.005,5.556 U4.38@-9.174,5.556
SCK1: U1.5 U4.23 | length 62.9
  Top Layer w0.5: U4.23@-0.324,11.206 -0.324,9.595 v2(0,9.271)
  Bottom Layer w0.5: v2(0,9.271) 2.794,9.271 5.461,6.604 33.829,6.604 38.655,11.43 ; 37.156,9.931 38.655,11.43 ; 38.655,11.43 51.308,11.43 ; 51.308,11.43 51.562,11.176 U1.5@52.832,9.906 51.308,11.43
SCK2: U3.5 U4.43 | length 67.9
  Top Layer w0.5: U3.5@-55.372,9.906 -56.987,11.521 -60.615,11.521 -62.23,9.906 -62.23,4.445 -59.341,1.556 U4.43@-9.174,1.556
TX1: U2_FT1.1 U4.19 | length 56.1
  Top Layer w0.3: 49.657,14.097 49.911,14.097 50.131,14.317 50.131,15.46 U2_FT1.1@50.131,15.471
  Top Layer w0.5: U4.19@2.876,11.206 2.876,12.862 3.603,13.589 9.525,13.589 16.129,6.985 41.656,6.985 48.768,14.097 49.657,14.097
TX2: U2_FT2.1 U4.39 | length 54.6
  Top Layer w0.3: U2_FT2.1@-58.073,15.979 -58.039,15.945 -58.039,14.351
  Top Layer w0.5: -58.039,14.351 -58.039,14.224 -56.261,12.446 -55.626,11.811 -49.53,11.811 -42.475,4.756 U4.39@-9.174,4.756
VCC: C2_FT1.2 C2_FT2.2 C3_FT1.1 C3_FT2.1 C11.1 C12.2 C15.1 JP1_FT1.1 JP1_FT2.1 R1_FT1.2 R1_FT2.2 R2_FT1.2 R2_FT2.2 U2_FT1.20 U2_FT2.20 U10.1 U11.3 | length 171.2
  Top Layer w0.3: U2_FT2.20@-52.873,22.121 -52.873,20.869 -52.197,20.193 v1(-51.562,20.193) ; U2_FT1.20@55.331,22.121 55.331,20.742 55.88,20.193 v1(56.515,20.193)
  Top Layer w0.5: C3_FT2.1@-44.196,18.288 C2_FT2.2@-44.196,20.386 ; C3_FT1.1@64.008,18.222 v1(64.008,18.161) C2_FT1.2@64.008,20.386
  Top Layer w1: C11.1@20.32,12.232 20.842,12.232 U10.1@23.59,14.98 U11.3@23.59,18.04
  Bottom Layer w0.5: R1_FT2.2@-46.736,18.222 -49.591,18.222 v1(-51.562,20.193) -49.469,22.286 R2_FT2.2@-46.736,22.286 ; R2_FT2.2@-46.6,22.286 R2_FT2.2@-46.736,22.286 ; JP1_FT2.1@-46.228,24.892 -46.736,24.384 R2_FT2.2@-46.736,22.286 ; C15.1@14.224,12.232 15.174,13.182 C12.2@15.174,14.732 ; 56.515,18.222 v1(56.515,20.193) 58.608,22.286 R2_FT1.2@61.468,22.286 61.468,24.384 JP1_FT1.1@61.976,24.892 ; 58.486,18.222 58.801,18.222 ; R1_FT1.2@61.468,18.222 61.529,18.161 v1(64.008,18.161)
  Bottom Layer w0.75: R1_FT2.2@-46.736,18.222 v2(-44.196,18.222) -21.778,18.222 -15.788,12.232 C15.1@14.224,12.232 C11.1@20.32,12.232
  Bottom Layer w1: C11.1@20.32,12.232 34.036,12.232 35.266,13.462 44.196,13.462 ; 36.971,13.462 44.196,13.462 ; 58.801,18.222 R1_FT1.2@61.468,18.222 53.34,18.222 51.623,18.222 46.863,13.462 44.196,13.462
VIN: C7.1 C9.1 C10.2 R15.1 S6.3 U11.1 | length 32.5
  Top Layer w0.5: R15.1@25.085,33.147 25.085,28.287 S6.3@25.432,27.94
  Top Layer w1: U11.1@23.59,22.6 25.432,24.442 25.432,26.257 ; S6.3@25.432,27.94 25.432,26.257 ; C9.1@34.584,16.256 C7.1@34.584,22.352 34.584,24.598 33.909,25.273 26.416,25.273 25.432,26.257
  Bottom Layer w0.5: C9.1@34.584,16.256 35.534,15.306 C10.2@37.084,15.306
pads on no net: J1_FT1.4 J1_FT1.6 J1_FT1.7 J1_FT1.8 J1_FT1.9 J1_FT2.4 J1_FT2.6 J1_FT2.7 J1_FT2.8 J1_FT2.9 S5.0 S6.0 S6.1 U1.25 U1.26 U2_FT1.2 U2_FT1.3 U2_FT1.6 U2_FT1.8 U2_FT1.9 U2_FT1.10 U2_FT1.11 U2_FT1.13 U2_FT1.14 U2_FT1.19 U2_FT1.24 U2_FT1.27 U2_FT1.28 U2_FT2.2 U2_FT2.3 U2_FT2.6 U2_FT2.8 U2_FT2.9 U2_FT2.10 U2_FT2.11 U2_FT2.13 U2_FT2.14 U2_FT2.19 U2_FT2.24 U2_FT2.27 U2_FT2.28 U3.25 U3.26 U4.56 U4.57 U4.58 U4.59 U9.0 U9.7 U9.8 U9.9 U9.10

## Polygon pours and split planes (outlines as drawn)
GND on Bottom Layer "Bottom Layer-GND" (hatched 45Degree grid 0.2 track 0.2, remove dead copper, shelved, pour order 4): -70,35 -70,-35 70,-35 70,35 -70,35
GND on Top Layer "Bottom Layer-GND" (hatched 45Degree grid 0.2 track 0.2, remove dead copper, shelved, pour order 2): -70,35 -70,-35 70,-35 70,35 -70,35

## Keep-outs
Keep-Out Layer:
  the board outline again, w0.254

## Other copper
Top Layer:
  pour cut-out: -60.96,35 -60.96,28.575 cw(c-63.5,28.575) -63.5,26.035 -70,26.035 -70,35
  pour cut-out: -70,-25.96 -63.575,-25.96 cw(c-63.575,-28.5) -61.035,-28.5 -61.035,-35 -70,-35
  pour cut-out: 60.96,-35 60.96,-28.575 cw(c63.5,-28.575) 63.5,-26.035 70,-26.035 70,-35
  pour cut-out: 70,25.96 63.575,25.96 cw(c63.575,28.5) 61.035,28.5 61.035,35 70,35
Bottom Layer:
  pour cut-out: -60.96,35 -60.96,28.575 cw(c-63.5,28.575) -63.5,26.035 -70,26.035 -70,35
  pour cut-out: -70,-25.96 -63.575,-25.96 cw(c-63.575,-28.5) -61.035,-28.5 -61.035,-35 -70,-35
  pour cut-out: 60.96,-35 60.96,-28.575 cw(c63.5,-28.575) 63.5,-26.035 70,-26.035 70,-35
  pour cut-out: 70,25.96 63.575,25.96 cw(c63.575,28.5) 61.035,28.5 61.035,35 70,35

## Text inside footprints (layer, text, board x,y; h text height)
U9: Top Overlay "16" at 7.781,26.059 h1.27; Top Overlay "1" at -34.383,26.059 h1.27